# EAGLE board placa (EAGLE 5.01)

Size 160 x 100 mm. Coordinates in mm from the lower left corner, seen from the top.
Outline: 0,0 160,0 160,100 0,100 0,0
Copper layers (1*16): Top 0.035mm / dielectric 1.5mm / Bottom 0.035mm
Design rules "default": minimum track width 10mil, minimum drill 24mil, track to track 8mil, track to pad 8mil, pad to pad 8mil, via to via 8mil, smd to smd 8mil, copper to edge 40mil, drill to drill 8mil, minimum pad ring 10mil, minimum via ring 8mil, stop-mask expansion 4mil, vias tented up to drill 0mil, thermal gap 10mil

## Footprints (pad centres in the part's own frame; a part is rotated, then mirrored left to right if it is on the bottom)
LED5MM = drill 0.813 octagon: A -1.27,0; K 1.27,0
KK-156-4 = drill 1.7 pad 2.184 long: 1 -5.94,0; 2 -1.98,0; 3 1.98,0; 4 5.94,0
KK-156-2 = drill 1.7 pad 2.184 long: 1 -1.98,0; 2 1.98,0

## Placement (x,y rotation side)
D1  [LED5MM]  59.05,57.62 0 top
D2  [LED5MM]  66.67,57.62 0 top
D3  [LED5MM]  74.29,57.62 0 top
D4  [LED5MM]  81.91,57.62 0 top
D5  [LED5MM]  89.53,57.62 0 top
D6  [LED5MM]  59.05,50 0 top
D7  [LED5MM]  66.67,50 0 top
D8  [LED5MM]  74.29,50 0 top
D9  [LED5MM]  81.91,50 0 top
D10  [LED5MM]  89.53,50 0 top
D11  [LED5MM]  89.53,42.38 0 top
D12  [LED5MM]  81.91,42.38 0 top
D13  [LED5MM]  74.29,42.38 0 top
D14  [LED5MM]  66.67,42.38 0 top
D15  [LED5MM]  59.05,42.38 0 top
D16  [LED5MM]  59.05,34.76 0 top
D17  [LED5MM]  66.67,34.76 0 top
D18  [LED5MM]  74.29,34.76 0 top
D19  [LED5MM]  81.91,34.76 0 top
D20  [LED5MM]  89.53,34.76 0 top
D21  [LED5MM]  89.53,27.14 0 top
D22  [LED5MM]  81.91,27.14 0 top
D23  [LED5MM]  74.29,27.14 0 top
D24  [LED5MM]  66.67,27.14 0 top
D25  [LED5MM]  59.05,27.14 0 top
D26  [LED5MM]  59.05,19.52 0 top
D27  [LED5MM]  66.67,19.52 0 top
D28  [LED5MM]  74.29,19.52 0 top
D29  [LED5MM]  81.91,19.52 0 top
D30  [LED5MM]  89.53,19.52 0 top
D31  [LED5MM]  89.53,11.9 0 top
D32  [LED5MM]  81.91,11.9 0 top
D33  [LED5MM]  74.29,11.9 0 top
D34  [LED5MM]  66.67,11.9 0 top
D35  [LED5MM]  59.05,11.9 0 top
X1  [KK-156-4]  40,47.46 270 top
X2  [KK-156-4]  67.94,74.13 0 top
X3  [KK-156-4]  40,23.33 270 top
X4  [KK-156-2]  80.64,74.13 0 top

## Library data of the parts
D1-D35 = led
X1-X4 = con-molex

## Nets
N$2: D6.A D7.A D8.A D9.A D10.A X1.3
N$3: D11.A D12.A D13.A D14.A D15.A X1.4
N$6: D26.A D27.A D28.A D29.A D30.A X2.3
N$7: D31.A D32.A D33.A D34.A D35.A X2.4
N$8: D1.K D6.K D15.K D16.K D25.K D26.K D35.K X3.1
N$9: D2.K D7.K D14.K D17.K D24.K D27.K D34.K X3.2
N$10: D3.K D8.K D13.K D18.K D23.K D28.K D33.K X3.3
N$11: D4.K D9.K D12.K D19.K D22.K D29.K D32.K X3.4
N$12: D5.K D10.K D11.K D20.K D21.K D30.K D31.K X4.1
N$15: D21.A D22.A D23.A D24.A D25.A X2.2
N$16: D16.A D17.A D18.A D19.A D20.A X2.1
N$30: D1.A D2.A D3.A D4.A D5.A X1.2

## Tracks (layer width: path | path; a pad name or v marks a point on that pad's centre or on a via)
N$2  (5 unrouted)
N$3  (5 unrouted)
N$6  (5 unrouted)
N$7  (5 unrouted)
N$8  (7 unrouted)
N$9  (7 unrouted)
N$10  (7 unrouted)
N$11  (7 unrouted)
N$12  (7 unrouted)
N$15  (5 unrouted)
N$16  (5 unrouted)
N$30  (5 unrouted)